# EAGLE board MOD-v2-2.2 (EAGLE 8.3.1)
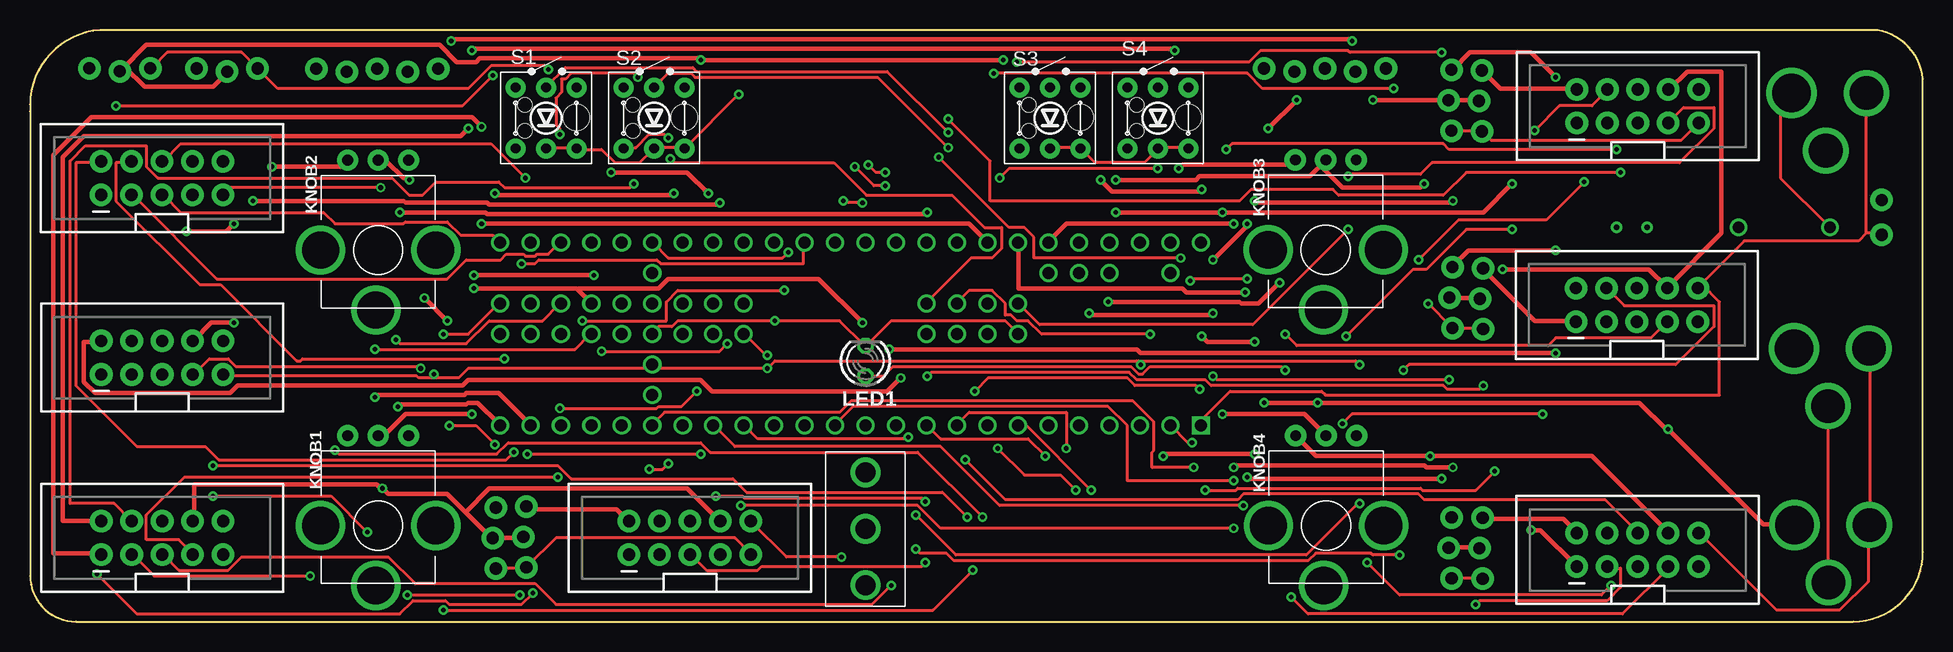
[diagram p0: board, top side]
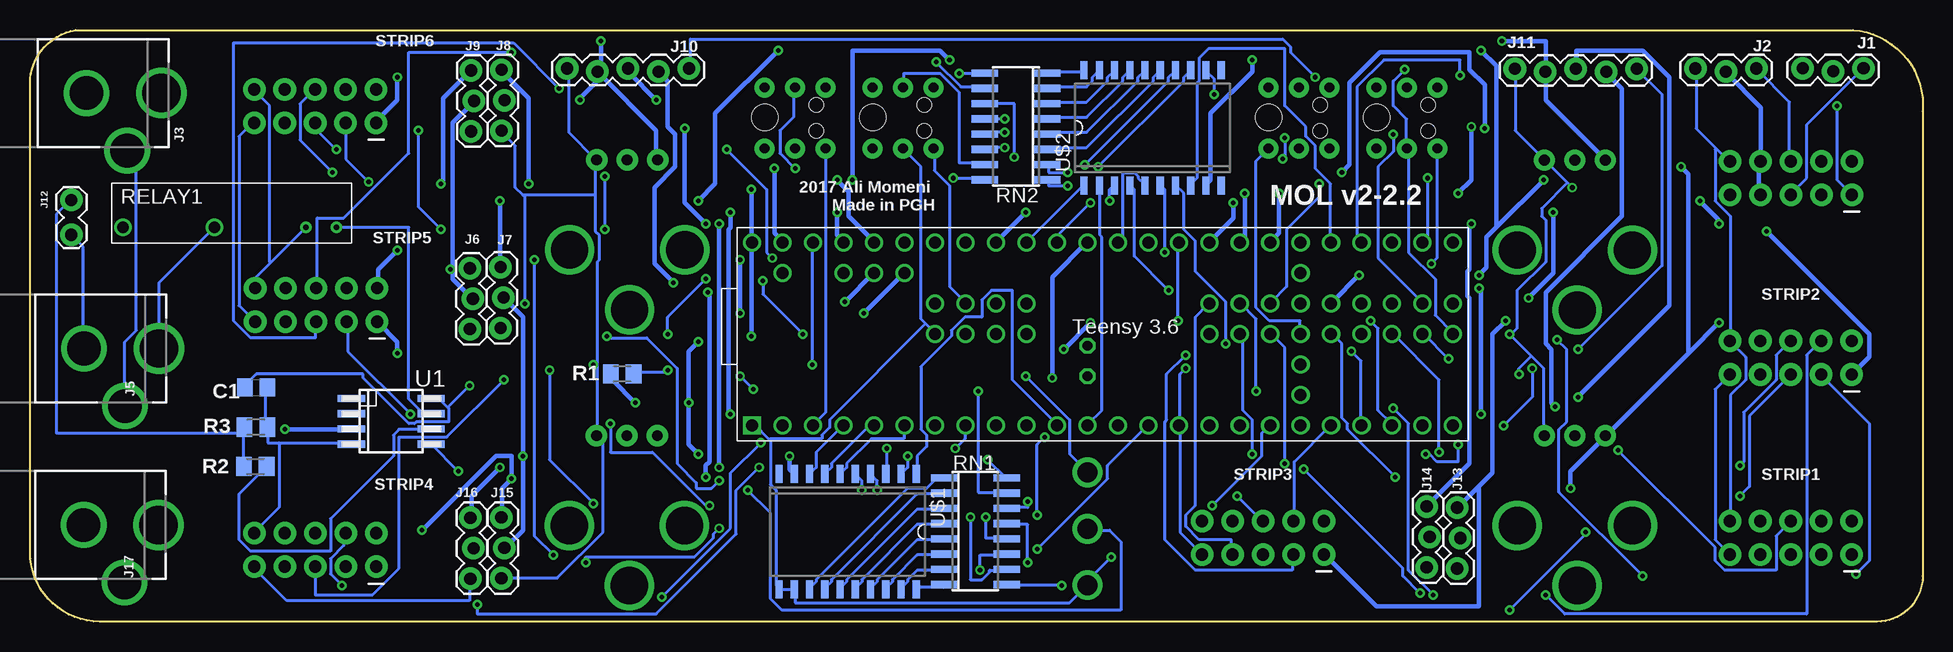
[diagram p1: board, bottom side, seen from below]

Size 157.79 x 49.34 mm. Coordinates in mm from the lower left corner, seen from the top.
Outline: 5.83,49.34 arc90 0.02,42.53 0.02,3.81 arc90 3.83,0 151.98,0 arc90 157.79,5.81 157.79,45.26 arc74 153.98,49.34 5.83,49.34
Copper layers (1*16): Top 0.035559375mm / dielectric 1.501140625mm / Bottom 0.035559375mm
Design rules "typical_4pcb *": minimum track width 10mil, minimum drill 15mil, track to track 6mil, track to pad 6mil, pad to pad 6mil, via to via 10mil, smd to smd 6mil, copper to edge 15mil, drill to drill 8mil, minimum pad ring 10mil, minimum via ring 8mil, stop-mask expansion 4mil, vias tented up to drill 0mil, thermal gap 10mil
Net classes: 2 Power: width 0.381 mm, clearance 0.279 mm; 3 Analog Sig: width 0.381 mm, clearance 0.279 mm

## Footprints (pad centres in the part's own frame; a part is rotated, then mirrored left to right if it is on the bottom)
C0805 = smd 1.3 x 1.5: 1 -0.95,0; 2 0.95,0
1X03_LOCK@1 = drill 1.016 pad 1.88: 1 0,0.127; 2 2.54,-0.127; 3 5.08,0.127
DCJACK_2MM_PTH = drill 2.8: GND 0,7.35; GNDBREAK 4.8,10.75 | drill 3.2: PWR 0,13.6
2X5-SHROUDED_LOCK = drill 1.016 pad 1.88: 1 -1.397,5.08; 2 1.397,5.08; 3 -1.397,2.54; 4 1.397,2.54; 5 -1.397,0; 6 1.397,0; 7 -1.397,-2.54; 8 1.397,-2.54; 9 -1.397,-5.08; 10 1.397,-5.08
1X03_LOCK = drill 1.016 pad 1.88: 1 0,0.127; 2 2.54,-0.127; 3 5.08,0.127
1X05_LOCK = drill 1.016 pad 1.88: 1 0,0.127; 2 2.54,-0.127; 3 5.08,0.127; 4 7.62,-0.127; 5 10.16,0.127
1X02_LOCK = drill 1.016 pad 1.88: 1 -0.178,0; 2 2.718,0
TRIM-PCB-9MM = drill 0.9 pad 1.778: 1 -2.54,-7.5; 2 0,-7.5; 3 2.54,-7.5 | drill 3.1 pad 4: M1 -4.8,0; M2 4.8,0; M3 0.2,5
LED3MM = drill 0.813 octagon: A -1.27,0; K 1.27,0
M0805 = smd 1.3 x 1.6: 1 -0.95,0; 2 0.95,0
G6DN-1A = drill 0.45: 1 0,0; 2 2.54,0 | drill 0.95: 5 10.16,0; 8 17.78,0
SO16 = smd 0.6 x 2.2: 1 -4.445,-2.6; 2 -3.175,-2.6; 3 -1.905,-2.6; 4 -0.635,-2.6; 5 0.635,-2.6; 6 1.905,-2.6; 7 3.175,-2.6; 8 4.445,-2.6; 9 4.445,2.6; 10 3.175,2.6; 11 1.905,2.6; 12 0.635,2.6; 13 -0.635,2.6; 14 -1.905,2.6; 15 -3.175,2.6; 16 -4.445,2.6
SWITCH_TR2-MOMENTARY-LED = drill 0.8 pad 1.676: 1 2.54,-2.54; 2 2.54,2.54; 3 -2.54,-2.54; 4 -2.54,2.54; A 0,2.54; C 0,-2.54 | hole 2.2: 2.53,0.05 | hole 1.2: -1.76,1.1; -1.76,-1.09
SWITCH_SPDT_500SSP1S2M2QEA = drill 1.65: 1 -4.7,0; 2 0,0; 3 4.7,0
TEENSY3-6_NO-USB-HOST = drill 1: 0 3.81,1.27; 1 6.35,1.27; 2 8.89,1.27; 3 11.43,1.27; 3V3(1) 36.83,1.27; 3V3(2) 46.99,6.35; 3V3(3) 6.35,16.51; 3V3(4) 59.69,11.43; 4 13.97,1.27; 5 16.51,1.27; 6 19.05,1.27; 7 21.59,1.27; 8 24.13,1.27; 9 26.67,1.27; 10 29.21,1.27; 11 31.75,1.27; 12 34.29,1.27; 13 34.29,16.51; 14 31.75,16.51; 15 29.21,16.51; 16 26.67,16.51; 17 24.13,16.51; 18 21.59,16.51; 19 19.05,16.51; 20 16.51,16.51; 21 13.97,16.51; 22 11.43,16.51; 23 8.89,16.51; 24 39.37,1.27; 25 41.91,1.27; 26 44.45,1.27; 27 46.99,1.27; 28 49.53,1.27; 29 52.07,1.27; 30 54.61,1.27; 31 57.15,1.27; 32 59.69,1.27; 33 59.69,16.51; 34 57.15,16.51; 35 54.61,16.51; 36 52.07,16.51; 37 49.53,16.51; 38 46.99,16.51; 39 44.45,16.51; 40 39.37,8.89; 41 41.91,8.89; 42 44.45,8.89; 43 49.53,8.89; 44 52.07,8.89; 45 54.61,8.89; 46 57.15,8.89; 47 57.15,11.43; 48 54.61,11.43; 49 52.07,11.43; 50 49.53,11.43; 51 44.45,11.43; 52 41.91,11.43; 53 39.37,11.43; 54 24.13,11.43; 55 21.59,11.43; 56 19.05,11.43; 57 16.51,11.43; A10 11.43,13.97; A11 13.97,13.97; AGND 3.81,16.51; AREF 8.89,13.97; DAC0 41.91,16.51; DAC1 39.37,16.51; DC 21.59,8.89; DD 24.13,8.89; DE 19.05,8.89; G1 46.99,8.89; G2 36.83,16.51; G3 59.69,8.89; G6 16.51,8.89; P 46.99,11.43; R 46.99,13.97; VBAT 46.99,3.81; VIN 1.27,16.51; VUSB 3.81,13.97 | drill 1 square: G0 1.27,1.27
ATTINY85 = smd 0.6 x 2.286: 1 -1.905,-3.33; 2 -0.635,-3.33; 3 0.635,-3.33; 4 1.905,-3.33; 5 1.905,3.33; 6 0.635,3.33; 7 -0.635,3.33; 8 -1.905,3.33
SOIC20 = smd 0.6 x 1.5: 1 -5.715,-4.8; 2 -4.445,-4.8; 3 -3.175,-4.8; 4 -1.905,-4.8; 5 -0.635,-4.8; 6 0.635,-4.8; 7 1.905,-4.8; 8 3.175,-4.8; 9 4.445,-4.8; 10 5.715,-4.8; 11 5.715,4.8; 12 4.445,4.8; 13 3.175,4.8; 14 1.905,4.8; 15 0.635,4.8; 16 -0.635,4.8; 17 -1.905,4.8; 18 -3.175,4.8; 19 -4.445,4.8; 20 -5.715,4.8

## Placement (x,y rotation side)
C1  10uF  [C0805]  138.94,19.54 0 bottom
J1  SERVO1  [1X03_LOCK@1]  10.03,46.02 0 bottom
J2  SERVO2  [1X03_LOCK@1]  18.97,46 0 bottom
J3  TO Pi  [DCJACK_2MM_PTH]  160.44,44.08 270 bottom
J4  ACTUATORS  [2X5-SHROUDED_LOCK]  11.01,36.99 90 top
J5  Battery (Pi)  [DCJACK_2MM_PTH]  160.63,22.77 270 bottom
J6  AN5  [1X03_LOCK]  120.99,24.39 90 bottom
J7  AN6  [1X03_LOCK]  118.44,24.48 90 bottom
J8  AN7  [1X03_LOCK]  118.36,40.94 90 bottom
J9  AN8  [1X03_LOCK]  120.9,40.88 90 bottom
J10  JOY1  [1X05_LOCK]  113.02,46 0 bottom
J11  JOY2  [1X05_LOCK]  34.02,45.98 0 bottom
J12  RPi-Shutdown  [1X02_LOCK]  154.35,34.98 270 bottom
J13  AN5  [1X03_LOCK]  38.7,4.43 90 bottom
J14  AN6  [1X03_LOCK]  41.25,4.52 90 bottom
J15  AN7  [1X03_LOCK]  118.37,3.61 90 bottom
J16  AN8  [1X03_LOCK]  120.95,3.58 90 bottom
J17  Battery (Main)  [DCJACK_2MM_PTH]  160.67,8.06 270 bottom
KNOB1  [TRIM-PCB-9MM]  29.02,8 180 top
KNOB2  [TRIM-PCB-9MM]  29.02,30.99 180 top
KNOB3  [TRIM-PCB-9MM]  108.01,31.01 180 top
KNOB4  [TRIM-PCB-9MM]  108.03,8 180 top
LED1  [LED3MM]  69.64,21.74 90 top
R1  330  [M0805]  108.43,20.65 0 bottom
R2  2.2K  [M0805]  139.01,12.95 180 bottom
R3  3.3K  [M0805]  138.95,16.22 0 bottom
RELAY1  RELAY-OMRON-G6DN  [G6DN-1A]  132.25,32.88 180 bottom
RN1  [SO16]  78.99,7.54 270 bottom
RN2  [SO16]  75.6,41.29 90 bottom
S1  SW-LEDPTH  [SWITCH_TR2-MOMENTARY-LED]  43.02,42 0 top
S2  SW-LEDPTH  [SWITCH_TR2-MOMENTARY-LED]  52.02,42 0 top
S3  SW-LEDPTH  [SWITCH_TR2-MOMENTARY-LED]  85.02,42 0 top
S4  SW-LEDPTH  [SWITCH_TR2-MOMENTARY-LED]  94.02,42 0 top
STRIP1  [2X5-SHROUDED_LOCK]  11.02,6.99 90 top
STRIP2  [2X5-SHROUDED_LOCK]  11.02,22.01 90 top
STRIP3  [2X5-SHROUDED_LOCK]  55.01,6.99 90 top
STRIP4  [2X5-SHROUDED_LOCK]  134.01,5.98 90 top
STRIP5  [2X5-SHROUDED_LOCK]  133.94,26.41 90 top
STRIP6  [2X5-SHROUDED_LOCK]  134.02,42.99 90 top
SW2  500SSP1S2M2QEA  [SWITCH_SPDT_500SSP1S2M2QEA]  69.64,7.74 270 top
TEENSY  TEENSY3_6-ALI_NO-USB-HOST  [TEENSY3-6_NO-USB-HOST]  98.86,15.09 0 bottom
U1  ATTINY85  [ATTINY85]  127.68,16.7 270 bottom
U$1  A2982  [SOIC20]  89.63,7.5 180 bottom
U$2  A2982  [SOIC20]  64.21,41.18 0 bottom

## Library data of the parts
C1 = resistor
J1 J2 J6 J9-J12 J14 J16 = SparkFun-Connectors
J3 J5 J17 = adafruit
J4 STRIP1-STRIP6 = SparkFun-Connectors; PROD_ID: CONN-08671; SF_ID: PRT-08506
J7 J8 J13 J15 = SparkFun-Connectors; GND: GND; SIG: SIG; VCC: VCC
KNOB1-KNOB4 RELAY1 S1-S4 TEENSY U$1 U$2 = CMU-ArtFab
LED1 = led; GND: -; P: +
R1-R3 = rcl
RN1 RN2 = resistor-bourns; OC_FARNELL: unknown; OC_NEWARK: unknown
SW2 = CMU-ArtFab; DIGIKEY: EG5137-ND
U1 = attiny85

## Nets
+3V3: J4.9 J6.1 J7.1 J8.1 J9.1 J10.1 J11.1 J13.1 J14.1 J15.1 J16.1 KNOB1.1 KNOB2.1 KNOB3.1 KNOB4.1 STRIP1.9 STRIP2.9 STRIP3.9 STRIP4.9 STRIP5.9 STRIP6.9 TEENSY.3V3(1) TEENSY.3V3(2) TEENSY.3V3(3) TEENSY.3V3(4)
+5V [Power]: J1.2 J2.2 J4.7 J4.8 J17.PWR R1.1 TEENSY.VIN U1.3 U$1.9 U$2.9
+5V-BATTERY: C1.1 SW2.1 U1.8
+5V-BATTERY-PI: J5.PWR RELAY1.5
AGND [Analog Sig]: J6.2 J7.2 J8.2 J9.2 J10.2 J11.2 J13.2 J14.2 J15.2 J16.2 KNOB1.3 KNOB2.3 KNOB3.3 KNOB4.3 STRIP1.8 STRIP2.8 STRIP3.8 STRIP4.8 STRIP5.8 STRIP6.8 TEENSY.AGND
AN1 [Analog Sig]: STRIP1.1 TEENSY.39
AN2 [Analog Sig]: STRIP1.2 TEENSY.DAC0
AN3 [Analog Sig]: STRIP2.1 TEENSY.DAC1
AN4 [Analog Sig]: STRIP2.2 TEENSY.15
AN5 [Analog Sig]: J13.3 STRIP3.1 TEENSY.18
AN6 [Analog Sig]: J14.3 STRIP3.2 TEENSY.19
AN7 [Analog Sig]: J15.3 STRIP4.1 TEENSY.20
AN8 [Analog Sig]: J16.3 STRIP4.2 TEENSY.21
AN9 [Analog Sig]: J6.3 KNOB1.2 STRIP5.1 TEENSY.49
AN10 [Analog Sig]: J7.3 KNOB2.2 STRIP5.2 TEENSY.50
AN11 [Analog Sig]: J8.3 KNOB3.2 STRIP6.1 TEENSY.22
AN12 [Analog Sig]: J9.3 KNOB4.2 STRIP6.2 TEENSY.23
B1: STRIP1.3 TEENSY.48
B2: STRIP1.4 TEENSY.51
B3: STRIP2.3 TEENSY.42
B4: STRIP2.4 TEENSY.52
B5: STRIP3.3 TEENSY.40
B6: STRIP3.4 TEENSY.28
B7: STRIP4.3 TEENSY.27
B8: STRIP4.4 TEENSY.26
B9: STRIP5.3 TEENSY.25
B10: STRIP5.4 TEENSY.24
B11: STRIP6.3 TEENSY.12
B12: STRIP6.4 TEENSY.11
B13: S1.3 TEENSY.13
B14: S2.3 TEENSY.54
B15: S3.3 TEENSY.56
B16: S4.3 TEENSY.1
GND: C1.2 J1.1 J2.1 J3.GND J4.10 J5.GND J12.2 J17.GND LED1.K R3.2 RELAY1.2 S1.1 S1.C S2.1 S2.C S3.1 S3.C S4.1 S4.C STRIP1.10 STRIP2.10 STRIP3.10 STRIP4.10 STRIP5.10 STRIP6.10 SW2.3 TEENSY.G0 TEENSY.G1 TEENSY.G2 TEENSY.G3 TEENSY.G6 U1.4 U$1.11 U$1.12 U$2.12
GNDBREAK: J3.GNDBREAK J5.GNDBREAK J17.GNDBREAK
JOYB1: J10.5 TEENSY.47
JOYB2: J11.5 TEENSY.44
JOYH1 [Analog Sig]: J10.3 TEENSY.A11
JOYH2 [Analog Sig]: J11.3 TEENSY.31
JOYV1 [Analog Sig]: J10.4 TEENSY.A10
JOYV2 [Analog Sig]: J11.4 TEENSY.32
LED1: STRIP1.7 TEENSY.43
LED2: STRIP2.7 TEENSY.41
LED3: STRIP3.7 TEENSY.53
LED4: STRIP4.7 TEENSY.0
LED5: STRIP5.7 TEENSY.55
LED6: STRIP6.7 TEENSY.57
M_INA: J4.2 TEENSY.45
M_INB: J4.4 TEENSY.46
M_PWMA: J4.1 TEENSY.36
M_PWMB: J4.3 TEENSY.35
N$2: LED1.A R1.2
N$3: SW2.2 U1.5
N$4: RELAY1.1 U1.7
N$5: J12.1 R2.2 R3.1
N$6: J3.PWR RELAY1.8
N$7: RN1.1 U$1.13
N$8: RN1.2 U$1.14
N$11: RN1.3 U$1.15
N$12: RN1.5 U$1.17
N$13: RN1.4 U$1.16
N$14: RN1.6 U$1.18
N$15: RN1.7 U$1.19
N$16: RN1.8 U$1.20
N$17: RN2.1 U$2.13
N$18: RN2.2 U$2.14
N$19: RN2.3 U$2.15
N$20: RN2.4 U$2.16
N$21: RN2.5 U$2.17
N$22: RN2.6 U$2.18
N$23: RN2.7 U$2.19
N$24: RN2.8 U$2.20
PI-REST: R2.1 U1.6
PWM1: TEENSY.2 U$1.8
PWM2: TEENSY.3 U$1.7
PWM3: TEENSY.4 U$1.6
PWM4: TEENSY.5 U$1.5
PWM5: TEENSY.6 U$1.4
PWM6: TEENSY.7 U$1.3
PWM7: TEENSY.8 U$1.2
PWM8: TEENSY.9 U$1.1
PWM9: TEENSY.37 U$2.8
PWM10: TEENSY.29 U$2.7
PWM11: TEENSY.38 U$2.6
PWM12: TEENSY.14 U$2.5
PWM13: TEENSY.30 U$2.4
PWM14: TEENSY.16 U$2.3
PWM15: TEENSY.10 U$2.2
PWM16: TEENSY.17 U$2.1
PWM_1: RN1.9 STRIP1.5
PWM_2: RN1.10 STRIP1.6
PWM_3: RN1.11 STRIP2.5
PWM_4: RN1.12 STRIP2.6
PWM_5: RN1.13 STRIP3.5
PWM_6: RN1.14 STRIP3.6
PWM_7: RN1.15 STRIP4.5
PWM_8: RN1.16 STRIP4.6
PWM_9: RN2.9 STRIP5.5
PWM_10: RN2.10 STRIP5.6
PWM_11: RN2.11 STRIP6.5
PWM_12: RN2.12 STRIP6.6
PWM_13: RN2.13 S1.A
PWM_14: RN2.14 S2.A
PWM_15: RN2.15 S3.A
PWM_16: RN2.16 S4.A
S1: J1.3 J4.5 TEENSY.33
S2: J2.3 J4.6 TEENSY.34

## Tracks (layer width: path | path; a pad name or v marks a point on that pad's centre or on a via)
+3V3  (via drill 0.38)
  Top 0.254: J16.1 120.99,3.65 118.61,3.65 J15.1 | J6.1 120.99,24.45 118.61,24.45 J7.1 118.45,24.61 v116.54,26.51 | J8.1 118.61,40.96 120.99,40.96 J9.1 121.15,40.8 121.78,40.16 137.66,40.16 139.08,41.59 STRIP6.9 | v34.47,23.97 36.53,23.97 39.07,26.51 TEENSY.3V3(4) | v29.23,36.2 16.69,36.2 16.21,35.72 J4.9 | J13.1 38.91,4.45 41.29,4.45 J14.1 41.45,4.6 43.83,6.99 58.76,6.99 60.03,5.71 STRIP3.9 | 33.67,20.32 35.74,20.32 36.53,21.11 52.09,21.11 TEENSY.3V3(2) 51.93,21.43 52.25,21.11 v61.46,21.11 62.09,21.75 92.25,21.75 v92.57,21.43 92.41,21.75 110.51,21.75 v110.83,21.43 | 33.67,20.32 32.4,20.32 32.25,20.48 16.21,20.48 STRIP2.9 | 33.67,20.32 v33.67,20.64
  Bottom 0.254: J15.1 118.45,3.65 113.84,3.65 110.03,7.46 110.03,14.92 110.51,15.4 KNOB4.1 110.51,15.56 110.51,21.43 | STRIP4.9 139.08,4.45 136.39,1.75 121.15,1.75 121.15,3.49 J16.1 | STRIP5.9 139.08,25.08 140.35,26.35 140.35,40.48 139.24,41.59 STRIP6.9 | J10.1 112.89,46.04 112.89,40.8 110.67,38.58 KNOB3.1 110.67,38.42 110.67,35.56 | 110.67,35.56 116.54,35.56 | 116.54,35.56 116.7,35.56 117.34,36.2 117.34,39.69 118.45,40.8 J8.1 | 116.54,35.56 v116.54,26.51 | 110.51,21.43 110.51,30 110.35,30.16 110.35,32.23 110.67,32.54 110.67,35.56 | 32.64,22.15 31.61,21.11 31.61,15.56 KNOB1.1 | 32.64,22.15 v34.47,23.97 34.31,23.97 33.83,24.45 33.83,27.62 31.45,30 31.45,33.5 31.77,33.81 31.77,34.45 29.63,36.59 | J11.1 33.99,46.04 33.99,40.96 31.61,38.58 KNOB2.1 31.45,38.42 29.63,36.59 | 29.63,36.59 v29.23,36.2 | STRIP1.9 16.21,5.71 17.32,6.83 17.32,19.37 16.21,20.48 STRIP2.9 | v61.46,21.11 61.93,20.64 61.93,16.51 TEENSY.3V3(1) 61.93,16.35 61.93,7.46 60.19,5.71 STRIP3.9 | v92.57,21.43 92.57,31.59 TEENSY.3V3(3) | 32.64,22.15 33.67,21.11 v33.67,20.64 | v110.83,21.43 110.51,21.43
+5V  (via drill 0.38)
  Top 0.381: J2.2 16.37,45.72 15.26,44.61 9.54,44.61 7.96,46.2 J1.2 7.64,46.04 9.7,48.1 34.15,48.1 35.58,46.67 37.17,46.67 37.48,46.99 55.74,46.99 v55.9,46.83 v81.14,46.83 | J17.PWR 147.02,8.1 144.48,8.1 v136.54,16.03 136.39,16.03 134.16,18.26 v107.33,18.26 v102.89,18.26 | v94.48,13.81 94.63,13.97 v102.1,13.97 | v97.65,23.81 98.13,23.34 v102.1,23.34 | v89.24,36.83 90.19,35.88 97.49,35.88 v97.65,36.04
  Bottom 0.381: J4.7 13.67,35.72 13.67,38.26 J4.8 13.51,38.58 13.51,42.86 16.37,45.72 J2.2 | v55.9,46.83 55.9,45.88 59.39,42.39 59.39,36.83 59.71,36.51 U$2.9 | v136.54,16.03 131.15,16.03 U1.3 | v94.48,13.81 94.48,12.7 94.16,12.38 U$1.9 | v102.1,13.97 102.89,14.76 v102.89,18.26 102.89,22.54 v102.1,23.34 | v107.33,18.26 109.24,20.16 109.24,20.64 R1.1 | v97.65,23.81 97.65,31.59 TEENSY.VIN 97.65,31.75 v97.65,36.04 | v81.14,46.83 81.93,47.62 89.24,47.62 v89.24,36.83
+5V-BATTERY  (via drill 0.38)
  Top 0.254: v74.79,20.48 75.11,20.8 91.62,20.8 92.25,20.16 97.97,20.16 98.44,19.68 117.81,19.68 118.13,19.37 120.83,19.37 v121.15,19.68
  Bottom 0.254: 122.97,17.86 123.69,18.57 124.32,18.57 U1.8 | 122.97,17.86 122.89,17.78 122.89,16.67 125.59,16.67 125.75,16.51 126.23,16.51 130.04,20.32 130.04,20.64 138.93,20.64 139.88,19.68 C1.1 | v74.79,20.48 71.14,16.83 71.14,13.97 69.71,12.54 SW2.1 | 122.97,17.86 v121.15,19.68
+5V-BATTERY-PI
  Bottom 0.254: RELAY1.5 142.42,32.86 147.02,28.26 147.02,22.86 J5.PWR
AGND  (via drill 0.38)
  Top 0.381: KNOB4.3 105.59,15.4 107.18,13.81 v116.7,13.81 130.19,13.81 136.54,7.46 STRIP4.8 | v95.75,37.78 96.06,38.1 105.11,38.1 105.43,38.42 KNOB3.3 | STRIP6.8 136.7,44.45 138.13,45.88 140.99,45.88 140.99,32.38 136.54,27.94 STRIP5.8 136.39,27.94 134.96,29.37 v122.73,29.37 | J15.2 118.29,6.19 120.67,6.19 J16.2 | J9.2 120.67,43.5 118.29,43.5 J8.2 118.13,43.5 v111.94,43.5 | J6.2 120.83,26.99 118.45,26.99 J7.2 | 36.29,9.13 38.44,6.99 J13.2 38.75,6.99 40.98,6.99 J14.2 | 36.29,9.13 34.79,10.64 29.86,10.64 v29.39,11.11 29.23,11.11 28.91,11.43 13.67,11.43 13.67,8.41 STRIP1.8 | v17.01,24.92 15.1,24.92 13.67,23.5 STRIP2.8 | 36.29,9.13 38.28,11.11 54.79,11.11 57.49,8.41 STRIP3.8 | v20.18,37.94 25.9,37.94 26.37,38.42 KNOB2.3 | v110.19,48.42 110.03,48.58 35.26,48.58 v35.1,48.42
  Bottom 0.381: v95.75,37.78 95.75,32.38 95.11,31.75 TEENSY.AGND | J10.2 110.35,45.72 105.59,40.96 105.59,38.58 KNOB3.3 | 122.57,29.37 122.57,28.57 120.99,26.99 J6.2 | 122.57,29.37 122.57,41.59 120.83,43.34 J9.2 | J15.2 118.13,6.19 116.7,7.62 v116.7,13.81 116.7,25.4 118.29,26.99 J7.2 | v122.73,29.37 122.57,29.37 | v111.94,43.5 111.94,43.66 110.19,45.4 J10.2 | KNOB2.3 26.53,38.58 31.45,43.5 31.45,45.72 J11.2 31.45,46.04 31.45,48.42 v35.1,48.42 | v29.39,11.11 29.39,12.54 26.53,15.4 KNOB1.3 26.37,15.56 19.47,22.46 | 19.47,22.46 v17.01,24.92 | v20.18,37.94 19.55,37.31 19.55,22.54 19.47,22.46 | v110.19,48.42 110.19,46.35 110.51,46.04 J10.2
AN1  (via drill 0.38)
  Top 0.381: v53.68,35.72 53.52,35.56 38.91,35.56 v38.75,35.72 | v37.64,41.27 36.85,42.07 5.1,42.07 1.92,38.89 1.92,5.71 5.89,5.71 STRIP1.1
  Bottom 0.381: v53.68,35.72 53.68,32.38 54.31,31.75 TEENSY.39 | v38.75,35.72 37.64,36.83 v37.64,41.27
AN2  (via drill 0.38)
  Top 0.381: v56.53,35.72 54.79,37.47 v48.44,37.47 | v36.53,41.12 35.9,40.48 4.46,40.48 2.72,38.73 2.72,8.41 5.89,8.41 STRIP1.2
  Bottom 0.381: v56.53,35.72 56.53,32.07 56.85,31.75 TEENSY.DAC0 | v48.44,37.47 47.8,38.1 47.8,44.93 45.26,47.47 37.8,47.47 37.8,46.04 36.53,44.77 v36.53,41.12
AN3  (via drill 0.38)
  Top 0.381: v57.49,34.92 57.33,34.77 38.28,34.77 38.12,34.92 31.29,34.92 31.13,35.08 v18.59,35.08 | v17.01,33.18 16.37,32.54 v13.04,32.54
  Bottom 0.381: v57.49,34.92 57.49,33.66 59.39,31.75 TEENSY.DAC1 | v18.59,35.08 17.01,33.5 v17.01,33.18 | v13.04,32.54 4.46,23.97 4.46,22.07 5.89,20.64 STRIP2.1
AN4  (via drill 0.38)
  Top 0.381: v72.57,20.32 71.46,19.21 56.85,19.21 55.9,20.16 36.53,20.16 36.06,19.68 17.32,19.68 16.69,19.05 5.42,19.05 4.46,20 4.46,23.34 5.89,23.34 STRIP2.2
  Bottom 0.381: v72.57,20.32 72.57,28.73 69.71,31.59 TEENSY.15
AN5  (via drill 0.38)
  Top 0.381: v74.79,34.13 74.63,33.97 38.12,33.97 37.96,34.13 v30.82,34.13 | v34.79,25.08 v32.88,26.99
  Bottom 0.381: v74.79,34.13 77.17,31.75 TEENSY.18 | v30.82,34.13 30.82,29.05 v32.88,26.99 | v34.79,25.08 35.9,23.97 35.9,12.38 37.09,11.19 | 37.09,11.19 38.75,9.53 J13.3 | STRIP3.1 49.87,5.56 45.58,1.27 37.01,1.27 37.01,11.11 37.09,11.19
AN6  (via drill 0.38)
  Top 0.381: v37.64,33.18 78.28,33.18 79.71,31.75 TEENSY.19 | STRIP3.2 49.87,8.41 48.91,9.37 41.61,9.37 41.45,9.53 J14.3
  Bottom 0.381: v37.64,33.18 37.8,33.02 37.8,29.37 37.96,29.21 37.96,27.15 37.8,26.99 37.8,13.18 41.29,9.68 J14.3
AN7  (via drill 0.38)
  Top 0.381: v101.3,27.46 96.38,27.46 96.06,27.78 82.41,27.78 82.41,31.59 TEENSY.20 | v101.46,12.06 101.62,11.91 v117.65,11.91 | v125.11,7.62 125.91,7.62 128.92,4.6 STRIP4.1
  Bottom 0.381: v101.3,27.46 101.14,27.3 101.14,13.34 101.46,13.02 v101.46,12.06 | J15.3 118.45,8.73 118.45,11.11 v117.65,11.91 117.65,13.81 118.92,13.81 v125.11,7.62
AN8  (via drill 0.38)
  Top 0.381: v100.35,33.18 86.38,33.18 84.95,31.75 TEENSY.21 | v100.35,12.86 100.51,13.02 116.22,13.02 116.38,12.86 v118.61,12.86 | STRIP4.2 128.92,7.46 127.81,8.57 121.15,8.57 J16.3
  Bottom 0.381: v100.35,12.86 v100.35,33.18 | v118.61,12.86 120.99,10.48 120.99,8.73 J16.3
AN9  (via drill 0.38)
  Top 0.381: J6.3 121.15,29.37 125.43,25.08 128.77,25.08 STRIP5.1 | 45.66,27.7 45.58,27.78 v37.01,27.78 | 45.66,27.7 46.69,26.67 TEENSY.49 | v36.85,17.3 31.29,17.3 29.55,15.56 29.07,15.56 KNOB1.2 | v127.18,22.38 92.57,22.38 92.25,22.7 v71.62,22.7 | v69.39,24.92 65.74,28.57 53.2,28.57 52.41,27.78 45.74,27.78 45.66,27.7
  Bottom 0.381: v37.01,27.78 36.85,27.62 v36.85,17.3 | v127.18,22.38 127.18,23.34 128.77,24.92 STRIP5.1 | v69.39,24.92 v71.62,22.7
AN10  (via drill 0.38)
  Top 0.381: v127.18,30.96 119.88,30.96 118.61,29.69 J7.3 | v37.01,28.89 v47.01,28.89 | v31.61,36.83 31.45,36.99 31.13,36.99 29.71,38.42 29.07,38.42 KNOB2.2 | v118.61,35.08 118.45,34.92 102.25,34.92 v102.1,35.08 | v95.43,47.62 95.27,47.78 37.01,47.78 v36.85,47.62
  Bottom 0.381: v127.18,30.96 128.77,29.37 128.77,27.94 STRIP5.2 | v47.01,28.89 49.23,26.67 TEENSY.50 | v37.01,28.89 36.37,29.53 36.37,32.07 35.5,32.94 | v31.61,36.83 35.5,32.94 | v118.61,35.08 118.61,29.69 J7.3 | v102.1,35.08 100.67,36.51 100.67,42.39 v95.43,47.62 | v36.85,47.62 35.58,46.35 35.58,33.02 35.5,32.94
AN11  (via drill 0.38)
  Top 0.381: v127.18,45.4 125.11,47.47 120.03,47.47 118.61,46.04 J8.3 | v90.51,36.83 97.17,36.83 97.49,37.15 106.7,37.15 107.97,38.42 KNOB3.2 107.65,37.94 109.4,36.2 115.91,36.2 v116.22,36.51
  Bottom 0.381: v127.18,45.4 127.18,43.5 128.92,41.75 STRIP6.1 | v90.51,36.83 89.55,35.88 89.55,33.81 87.49,31.75 TEENSY.22 | v116.22,36.51 116.22,43.66 118.45,45.88 J8.3
AN12  (via drill 0.38)
  Top 0.381: v90.51,34.13 v99.4,34.13 121.15,34.13 v123.53,36.51 | v99.4,17.3 106.22,17.3 107.97,15.56 KNOB4.2 | STRIP6.2 128.92,44.45 122.57,44.45 121.15,45.88 J9.3
  Bottom 0.381: v90.51,34.13 90.51,32.23 90.03,31.75 TEENSY.23 | v123.53,36.51 123.37,36.67 123.37,43.66 121.15,45.88 J9.3 | v99.4,17.3 99.56,17.46 99.56,32.7 99.4,32.86 v99.4,34.13
B1  (via drill 0.38)
  Top 0.254: v30.5,23.5 30.82,23.18 36.37,23.18 38.28,25.08 42.72,25.08 44.15,26.51 TEENSY.48 | v23.36,3.81 10.34,3.81 8.59,5.56 STRIP1.3
  Bottom 0.254: v30.5,23.5 29.71,22.7 29.71,16.67 30.34,16.03 30.34,10.79 v23.36,3.81
B2  (via drill 0.38)
  Top 0.254: v50.34,36.51 50.03,36.2 39.55,36.2 39.07,36.67 33.83,36.67 32.72,35.56 31.61,35.56 30.18,36.99 10.66,36.99 9.7,37.94 9.7,39.69 4.62,39.69 3.35,38.42 3.35,9.84 7,9.84 8.43,8.41 STRIP1.4
  Bottom 0.254: v50.34,36.51 50.34,35.4 53.04,32.7 53.04,27.94 54.31,26.67 TEENSY.51
B3  (via drill 0.38)
  Top 0.254: v53.2,13.18 52.72,12.7 v51.61,12.7 | v41.93,2.38 40.98,1.43 34.94,1.43 34.63,1.75 31.93,1.75 30.82,0.64 8.91,0.64 v5.58,3.97
  Bottom 0.254: v53.2,13.18 53.2,22.86 54.31,23.97 TEENSY.42 | v51.61,12.7 43.36,4.45 43.36,3.81 v41.93,2.38 | v5.58,3.97 4.46,5.08 4.46,16.51 8.43,20.48 STRIP2.3
B4  (via drill 0.38)
  Top 0.254: v55.58,19.21 54.31,17.94 52.41,17.94 52.25,17.78 v44.15,17.78 | v31.45,2.22 v40.82,2.22
  Bottom 0.254: v55.58,19.21 55.58,25.24 56.85,26.51 TEENSY.52 | v44.15,17.78 42.88,16.51 42.88,4.29 v40.82,2.22 | v31.45,2.22 29.86,0.64 9.7,0.64 9.7,22.23 8.59,23.34 STRIP2.4
B5  (via drill 0.38)
  Top 0.254: v61.46,22.23 61.3,22.23 59.55,23.97 TEENSY.40
  Bottom 0.254: v61.46,22.23 63.04,20.64 63.04,16.83 63.2,16.67 63.2,6.83 60.66,4.29 52.57,4.29 52.57,5.56 STRIP3.3
B6
  Bottom 0.254: TEENSY.28 49.39,16.35 52.41,13.34 52.41,8.41 STRIP3.4
B7  (via drill 0.38)
  Top 0.254: v97.02,12.86 93.52,12.86 93.52,14.13 93.68,14.29 93.68,16.67 91.94,18.41 68.44,18.41 67.49,17.46 52.88,17.46 51.93,16.51 TEENSY.27 | v120.51,1.43 120.83,1.75 131.46,1.75 132.58,2.86 132.58,4.45 131.62,4.45 STRIP4.3
  Bottom 0.254: v97.02,12.86 98.92,10.95 98.92,7.3 105.59,0.64 120.51,0.64 v120.51,1.43
B8  (via drill 0.38)
  Top 0.254: v59.23,9.68 74,9.68 75.9,7.78 v100.35,7.78 | v111.46,4.92 114.16,2.22 130.99,2.22 v131.78,3.02
  Bottom 0.254: v59.23,9.68 55.11,13.81 55.11,15.72 54.47,16.35 TEENSY.26 | v100.35,7.78 100.83,7.3 100.83,6.99 102.41,5.4 111.46,5.4 v111.46,4.92 | v131.78,3.02 132.73,3.97 132.73,5.24 131.62,6.35 131.62,7.3 STRIP4.4
B9  (via drill 0.38)
  Top 0.254: v101.14,9.68 80.82,9.68 75.9,14.61 58.76,14.61 57.01,16.35 TEENSY.25 | v109.4,16.51 110.19,17.3 v126.07,17.3
  Bottom 0.254: v101.14,9.68 101.46,9.68 105.91,14.13 109.4,14.13 v109.4,16.51 | v126.07,17.3 131.31,22.54 131.31,24.92 STRIP5.3
B10  (via drill 0.38)
  Top 0.254: v73.2,15.4 73.04,15.24 60.66,15.24 59.55,16.35 TEENSY.24 | v73.84,8.89 77.17,5.56 106.38,5.56 110.67,9.84 v110.83,9.84 | v114.48,20.95 114.95,21.43 137.18,21.43 140.35,24.61 140.35,26.35 132.89,26.35 131.46,27.78 STRIP5.4
  Bottom 0.254: v73.2,15.4 73.84,14.76 v73.84,8.89 | v110.83,9.84 114.48,13.49 v114.48,20.95
B11  (via drill 0.38)
  Top 0.254: v73.84,6.03 74.16,5.71 76.38,5.71 77.01,5.08 106.54,5.08 107.18,5.71 111.78,5.71 111.94,5.56 v114.16,5.56 | v115.75,30.16 119.08,33.5 126.38,33.5 v129.56,36.67
  Bottom 0.254: v73.84,6.03 67.96,11.91 67.96,13.02 64.63,16.35 TEENSY.12 | v114.16,5.56 115.75,7.14 v115.75,30.16 | v129.56,36.67 131.46,38.58 131.46,41.59 STRIP6.3
B12  (via drill 0.38)
  Top 0.254: v100.35,11.75 91.46,11.75 91.46,16.35 89.87,17.94 68.6,17.94 67.17,16.51 TEENSY.11 | v109.72,23.81 115.27,29.37 116.38,29.37 119.72,32.7 v123.53,32.7 | v125.43,40.96 127.5,43.02 130.19,43.02 131.46,44.29 STRIP6.4
  Bottom 0.254: v100.35,11.75 100.98,11.11 102.25,11.11 102.25,11.59 103.84,13.18 103.84,21.11 106.38,23.65 109.72,23.65 v109.72,23.81 | v123.53,32.7 125.43,34.61 v125.43,40.96
B13  (via drill 0.38)
  Top 0.254: v40.98,29.84 42.09,29.84 42.41,30.16 52.25,30.16 52.57,29.84 64.47,29.84 64.47,31.59 TEENSY.13
  Bottom 0.254: v40.98,29.84 40.5,30.32 40.5,39.37 S1.3
B14  (via drill 0.38)
  Top 0.254: v53.36,38.58 53.68,38.26 67.01,38.26 69.71,35.56 76.85,35.56 79.55,32.86 80.98,32.86 80.98,31.11 80.19,30.32 78.44,30.32 74.79,26.67 TEENSY.54 | v53.2,40.32 52.88,40.64 51.61,40.64 50.5,39.53 49.55,39.53 S2.3
  Bottom 0.254: v53.36,38.58 53.2,38.73 v53.2,40.32
B15
  Bottom 0.254: TEENSY.56 79.87,26.67 81.14,27.94 81.14,36.35 82.41,37.62 82.41,39.37 S3.3
B16
  Bottom 0.254: TEENSY.1 92.41,16.51 91.46,17.46 91.46,39.37 S4.3
GND  (via drill 0.38)
  Top 0.254: J5.GND 153.37,22.7 153.37,8.1 J17.GND 153.21,7.94 153.21,3.33 150.83,0.95 145.59,0.95 139.24,7.3 STRIP4.10 | 153.05,32.38 153.05,43.97 J3.GND | 153.05,32.38 154.32,32.38 J12.2 | 153.05,32.38 152.42,31.75 142.89,31.75 139.08,27.94 STRIP5.10 139.4,28.1 140.83,26.67 140.83,18.89 107.97,18.89 107.65,19.21 100.03,19.21 97.65,16.83 97.65,16.51 TEENSY.G0 | J1.1 10.18,46.2 11.45,47.47 17.64,47.47 18.91,46.2 J2.1 19.07,46.04 20.66,44.45 36.53,44.45 38.44,46.35 42.88,46.35 v43.2,46.04 | v59.07,43.97 54.63,39.53 S2.1 54.47,39.53 52.09,39.53 S2.C 51.93,39.37 50.82,38.26 48.76,38.26 47.64,39.37 45.58,39.37 S1.1 45.42,39.53 43.04,39.53 S1.C | v67.65,5.4 63.04,5.4 60.19,8.26 STRIP3.10 | S3.C 85.11,39.53 87.49,39.53 S3.1 88.76,38.26 92.89,38.26 94,39.37 S4.C 94.16,39.53 96.54,39.53 S4.1 | TEENSY.G6 82.25,24.13 81.3,25.08 71.77,25.08 69.71,23.02 LED1.K 69.55,23.02 67.49,25.08 v62.09,25.08 53.99,25.08 53.52,24.61 52.41,24.61 51.93,24.13 TEENSY.G1
  Bottom 0.254: 137.74,29.92 138.93,28.73 138.93,27.94 STRIP5.10 | 137.74,29.92 134.8,32.86 RELAY1.2 | STRIP6.10 139.08,44.29 137.81,43.02 137.81,30 137.74,29.92 | C1.2 138.13,19.53 138.13,16.35 R3.2 137.97,16.19 137.97,14.92 137.02,14.92 | 137.02,14.92 131.15,14.92 U1.4 | 137.02,14.92 137.02,9.53 139.08,7.46 STRIP4.10 | J12.2 154.32,32.23 153.37,31.27 153.37,22.86 J5.GND | STRIP1.10 16.05,8.41 16.05,18.89 14.78,20.16 14.78,22.07 16.05,23.34 STRIP2.10 16.05,23.5 16.05,33.81 17.32,35.08 17.32,39.37 17.24,39.45 | 17.24,39.45 18.91,41.12 18.91,46.04 J2.1 | 17.24,39.45 16.21,38.42 J4.10 | v59.07,43.97 59.07,45.24 59.71,45.88 U$2.12 | TEENSY.G3 39.23,24.13 40.66,25.56 40.66,28.57 42.88,30.8 42.88,39.37 S1.C 43.04,39.53 43.04,41.91 44.15,43.02 44.15,45.09 v43.2,46.04 | v67.65,5.4 69.55,3.49 69.55,3.17 SW2.3 69.71,3.02 71.14,1.59 94,1.59 94,2.7 U$1.12 94.16,2.7 95.27,2.7 U$1.11 95.43,2.86 95.59,3.02 95.59,10.95 96.06,11.43 96.06,15.08 96.14,15.16 | 96.14,15.16 97.49,16.51 TEENSY.G0 | v62.09,25.08 62.09,31.59 TEENSY.G2 | 83.13,24.84 82.41,24.13 TEENSY.G6 | 83.13,24.84 83.52,25.24 83.52,37.94 84.95,39.37 S3.C | 83.13,24.84 91.14,16.83 91.14,16.19 91.78,15.56 91.78,15.24 96.06,15.24 96.14,15.16 | S2.1 54.63,39.37 55.58,38.42 55.58,26.19 54.47,25.08 51.93,25.08 51.93,24.13 TEENSY.G1
GNDBREAK
  Top 0.254: J5.GNDBREAK 149.88,17.94 149.88,3.33 J17.GNDBREAK
  Bottom 0.254: J3.GNDBREAK 149.56,39.21 148.93,38.58 148.93,24.29 149.88,23.34 149.88,18.1 J5.GNDBREAK
JOYB1  (via drill 0.38)
  Top 0.254: v44.15,40.64 44.15,41.12 43.83,41.43 43.83,43.66 44.31,44.13 44.31,45.24 44.63,45.24 45.1,45.72 50.34,45.72 v50.66,45.4
  Bottom 0.254: v44.15,40.64 44.15,39.21 45.42,37.94 45.42,30.32 41.77,26.67 TEENSY.47 | v50.66,45.4 52.72,47.47 52.72,47.94 53.36,48.58 102.73,48.58 102.73,46.2 J10.5
JOYB2  (via drill 0.38)
  Top 0.254: v28.75,22.7 45.42,22.7 46.69,23.97 TEENSY.44
  Bottom 0.254: v28.75,22.7 21.77,29.69 21.77,43.97 23.83,46.04 J11.5
JOYH1  (via drill 0.38)
  Top 0.381: v88.28,25.72 88.44,25.56 98.44,25.56 v98.6,25.72 | v98.6,30.16 101.46,33.02 v101.46,33.18 | v105.59,43.5 v103.21,41.12
  Bottom 0.381: v88.28,25.72 84.95,29.05 TEENSY.A11 | v98.6,30.16 v98.6,25.72 | v101.46,33.18 103.21,34.92 v103.21,41.12 | v105.59,43.5 107.81,45.72 107.81,46.04 J10.3
JOYH2  (via drill 0.38)
  Top 0.381: v28.75,18.73 28.91,18.89 36.21,18.89 36.37,19.05 39.07,19.05 41.61,16.51 TEENSY.31
  Bottom 0.381: v28.75,18.73 21.13,26.35 21.13,45.4 23.36,47.62 28.91,47.62 28.91,46.2 J11.3
JOYV1  (via drill 0.38)
  Top 0.381: v89.87,26.67 100.83,26.67 100.98,26.51 102.41,26.51 v104.16,28.26
  Bottom 0.381: v89.87,26.67 87.49,29.05 TEENSY.A10 | v104.16,28.26 105.75,29.84 105.75,36.2 104,37.94 104,40.64 104.64,41.27 104.64,45.09 105.27,45.72 J10.4
JOYV2  (via drill 0.38)
  Top 0.381: v30.66,17.94 30.82,18.1 36.37,18.1 36.53,18.26 37.33,18.26 39.07,16.51 TEENSY.32
  Bottom 0.381: v30.66,17.94 30.98,18.26 30.98,22.7 31.45,23.18 31.45,27.46 25.1,33.81 25.1,44.45 26.37,45.72 J11.4
LED1  (via drill 0.38)
  Top 0.254: v43.99,12.06 12.88,12.06 9.7,8.89 9.7,6.83 12.4,6.83 13.51,5.71 STRIP1.7
  Bottom 0.254: v43.99,12.06 47.96,16.03 47.96,16.51 48.44,16.99 48.44,23.18 49.23,23.97 TEENSY.43
LED2  (via drill 0.38)
  Top 0.254: v41.45,13.97 v55.9,13.97 | v38.75,14.76 37.17,16.35 v34.94,16.35 | v32.56,21.11 32.4,21.27 17.16,21.27 16.53,21.91 14.94,21.91 13.67,20.64 STRIP2.7
  Bottom 0.254: v55.9,13.97 55.9,16.83 56.69,17.62 56.69,23.81 56.85,23.97 TEENSY.41 | v41.45,13.97 41.14,13.97 40.5,13.34 38.75,13.34 v38.75,14.76 | v34.94,16.35 32.56,18.73 v32.56,21.11
LED3
  Bottom 0.254: TEENSY.53 59.55,26.51 60.66,25.4 60.66,9.68 61.46,8.89 61.46,7.94 60.34,6.83 57.65,6.83 57.65,5.71 STRIP3.7
LED4  (via drill 0.38)
  Top 0.254: v96.86,14.92 96.54,14.92 95.11,16.35 TEENSY.0 | v105.11,2.06 106.54,0.64 132.73,0.64 136.54,4.45 STRIP4.7
  Bottom 0.254: v96.86,14.92 99.4,12.38 99.4,7.78 v105.11,2.06
LED5  (via drill 0.38)
  Top 0.254: v93.36,23.97 84.32,23.97 83.2,25.08 82.25,25.08 81.78,25.56 81.3,25.56 81.3,26.51 80.19,27.62 78.28,27.62 77.33,26.67 TEENSY.55 | v96.7,28.42 96.86,28.57 v101.46,28.57 | v104.64,23.97 105.59,23.02 126.54,23.02 127.18,23.65 135.12,23.65 136.39,24.92 STRIP5.7
  Bottom 0.254: v93.36,23.97 96.7,27.3 v96.7,28.42 | v101.46,28.57 104.64,25.4 v104.64,23.97
LED6  (via drill 0.38)
  Top 0.254: v109.87,32.7 101.94,24.77 84.16,24.77 82.41,26.51 TEENSY.57 | v109.87,37.15 110.03,37.31 115.91,37.31 116.86,38.26 137.5,38.26 140.35,41.12 140.35,42.86 137.81,42.86 136.7,41.75 STRIP6.7
  Bottom 0.254: v109.87,37.15 v109.87,32.7
M_INA  (via drill 0.38)
  Top 0.254: v40.34,14.13 39.71,13.49 15.74,13.49 14.62,14.61 8.91,14.61 3.83,19.68 3.83,38.26 5.89,38.26 J4.2
  Bottom 0.254: v40.34,14.13 40.34,20.16 44.15,23.97 TEENSY.45
M_INB  (via drill 0.38)
  Top 0.254: v39.55,21.91 22.72,21.91 22.56,21.75 22.24,21.75 15.89,28.1 14.15,28.1 7.16,35.08 7.16,38.26 8.43,38.26 J4.4
  Bottom 0.254: v39.55,21.91 41.61,23.97 TEENSY.46
M_PWMA  (via drill 0.38)
  Top 0.254: v38.6,45.56 36.06,43.02 v7.16,43.02
  Bottom 0.254: v38.6,45.56 38.6,46.83 44.95,46.83 47.17,44.61 47.17,32.07 46.85,31.75 TEENSY.36 | v7.16,43.02 7.16,36.83 6.05,35.72 J4.1
M_PWMB
  Top 0.254: TEENSY.35 44.15,31.59 43.2,30.64 42.25,30.64 42.09,30.48 41.29,30.48 41.14,30.64 39.71,30.64 39.23,30.16 36.37,30.16 34.79,28.57 15.58,28.57 8.59,35.56 J4.3
N$2  (via drill 0.38)
  Top 0.254: v104.64,20.95 104.32,21.27 93.36,21.27 92.73,20.64 92.41,20.64 91.78,21.27 71.93,21.27 71.14,20.48 69.71,20.48 LED1.A
  Bottom 0.254: v104.64,20.95 104.64,20.8 107.33,20.8 R1.2
N$3  (via drill 0.38)
  Top 0.254: v122.1,12.54 120.51,10.95 116.07,10.95 115.91,11.11 100.67,11.11 100.51,10.95 v97.97,10.95
  Bottom 0.254: v122.1,12.54 124.32,14.76 U1.5 | v97.97,10.95 96.06,9.05 96.06,1.91 95.11,0.95 66.85,0.95 66.85,6.67 67.81,7.62 69.55,7.62 SW2.2
N$4
  Bottom 0.254: RELAY1.1 132.1,32.86 126.23,32.86 126.23,18.57 125.11,17.46 124.48,17.46 U1.7
N$5
  Bottom 0.254: 140.04,15.72 140.04,16.19 R3.1 140.04,15.72 | 140.04,15.72 140.04,13.02 R2.2 | 140.04,15.72 155.59,15.72 155.59,33.97 154.48,35.08 J12.1
N$6
  Top 0.254: RELAY1.8 149.88,33.02 145.91,36.99 145.91,43.97 146.7,43.97 J3.PWR
N$7
  Bottom 0.254: U$1.13 92.73,2.86 92.25,3.33 92.25,3.49 84.63,11.11 83.05,11.11 82.25,11.91 81.62,11.91 RN1.1
N$8
  Bottom 0.254: U$1.14 91.46,2.86 90.98,3.33 90.98,3.49 83.84,10.64 81.62,10.64 RN1.2
N$11
  Bottom 0.254: U$1.15 90.19,2.86 89.71,3.33 89.71,3.49 83.84,9.37 81.62,9.37 RN1.3
N$12
  Bottom 0.254: U$1.17 87.65,2.86 87.17,3.33 87.17,3.49 83.84,6.83 81.62,6.83 RN1.5
N$13
  Bottom 0.254: U$1.16 88.92,2.86 88.44,3.33 88.44,3.49 83.84,8.1 81.62,8.1 RN1.4
N$14
  Bottom 0.254: U$1.18 86.38,2.86 85.9,3.33 85.9,3.49 83.84,5.56 81.62,5.56 RN1.6
N$15
  Bottom 0.254: U$1.19 85.11,2.86 84.63,3.33 84.63,3.49 83.84,4.29 81.62,4.29 RN1.7
N$16
  Bottom 0.254: U$1.20 83.84,2.86 81.62,2.86 81.62,3.02 RN1.8
N$17  (via drill 0.38)
  Top 0.254: v68.76,37.94 70.35,36.35 v71.3,36.35
  Bottom 0.254: v68.76,37.94 61.61,45.09 61.61,45.4 61.14,45.88 U$2.13 | v71.3,36.35 72.89,36.35 72.89,36.83 RN2.1
N$18  (via drill 0.38)
  Top 0.254: v69.87,38.1 70.5,37.47 v71.3,37.47
  Bottom 0.254: v69.87,38.1 62.88,45.09 62.88,45.4 62.41,45.88 U$2.14 | v71.3,37.47 72.89,37.47 72.89,38.1 RN2.2
N$19
  Bottom 0.254: U$2.15 63.68,45.88 64.15,45.4 64.15,45.09 69.71,39.53 72.89,39.53 RN2.3
N$20
  Bottom 0.254: U$2.16 64.95,45.88 65.42,45.4 65.42,45.09 69.71,40.8 72.89,40.8 RN2.4
N$21
  Bottom 0.254: U$2.17 66.22,45.88 66.69,45.4 66.69,45.09 69.71,42.07 72.89,42.07 RN2.5
N$22
  Bottom 0.254: U$2.18 67.49,45.88 67.96,45.4 67.96,45.09 69.71,43.34 72.89,43.34 RN2.6
N$23
  Bottom 0.254: U$2.19 68.76,45.88 69.23,45.4 69.23,45.09 69.71,44.61 72.89,44.61 RN2.7
N$24
  Bottom 0.254: U$2.20 70.03,45.88 72.89,45.88 RN2.8
PI-REST
  Bottom 0.254: R2.1 138.13,12.86 140.35,10.64 140.35,6.83 139.4,5.87 132.73,5.87 132.73,8.57 127.5,13.81 127.5,15.56 127.02,16.03 124.48,16.03 U1.6
PWM1
  Bottom 0.254: U$1.8 92.73,12.38 92.25,12.86 92.25,14.13 90.03,16.35 TEENSY.2
PWM2
  Bottom 0.254: U$1.7 91.46,12.38 90.98,12.86 90.98,13.18 87.81,16.35 87.49,16.35 TEENSY.3
PWM3
  Bottom 0.254: U$1.6 90.19,12.38 89.71,12.86 89.71,13.18 87.65,15.24 84.95,15.24 84.95,16.35 TEENSY.4
PWM4  (via drill 0.38)
  Top 0.254: v88.44,10.95 83.05,16.35 82.41,16.35 TEENSY.5
  Bottom 0.254: v88.44,10.95 88.44,11.75 88.92,12.22 U$1.5
PWM5  (via drill 0.38)
  Top 0.254: v87.17,10.95 85.9,12.22 82.89,12.22 v80.66,14.45
  Bottom 0.254: v87.17,10.95 87.17,11.75 87.65,12.22 U$1.4 | v80.66,14.45 79.87,15.24 79.87,16.35 TEENSY.6
PWM6  (via drill 0.38)
  Top 0.254: v86.38,14.45 86.38,17.46 78.28,17.46 77.33,16.51 TEENSY.7
  Bottom 0.254: v86.38,14.45 86.38,12.38 U$1.3
PWM7  (via drill 0.38)
  Top 0.254: v84.63,13.81 83.2,15.24 75.9,15.24 74.79,16.35 TEENSY.8
  Bottom 0.254: v84.63,13.81 84.63,12.86 85.11,12.38 U$1.2
PWM8
  Bottom 0.254: U$1.1 83.84,12.38 83.84,13.81 83.05,14.61 83.05,15.56 83.52,16.03 83.52,21.27 80.98,23.81 80.98,24.29 79.87,25.4 78.44,25.4 78.44,26.83 77.65,27.62 75.9,27.62 75.9,20.16 72.25,16.51 TEENSY.9
PWM9
  Bottom 0.254: U$2.8 60.98,36.51 60.5,36.99 60.5,44.93 60.34,45.09 60.34,46.99 59.55,47.78 53.2,47.78 53.2,43.02 51.45,41.27 51.45,40.48 50.66,39.69 50.66,37.78 49.39,36.51 49.39,31.75 TEENSY.37
PWM10  (via drill 0.38)
  Top 0.254: v58.12,23.18 57.49,22.54 v47.64,22.54
  Bottom 0.254: v58.12,23.18 58.12,26.67 60.66,29.21 60.66,31.75 61.61,32.7 61.61,35.72 62.25,36.35 U$2.7 | v47.64,22.54 46.85,21.75 46.85,16.51 TEENSY.29
PWM11  (via drill 0.38)
  Top 0.254: v63.2,30.8 62.73,30.32 53.2,30.32 51.93,31.59 TEENSY.38
  Bottom 0.254: v63.2,30.8 63.2,36.04 63.52,36.35 U$2.6
PWM12
  Bottom 0.254: U$2.5 64.95,36.51 65.42,36.99 65.42,37.15 65.74,37.47 66.69,37.47 66.69,32.07 67.01,31.75 TEENSY.14
PWM13  (via drill 0.38)
  Top 0.254: v62.88,27.62 53.99,27.62 53.04,26.67 53.04,25.08 v46.06,25.08
  Bottom 0.254: v62.88,27.62 65.74,30.48 65.74,36.04 66.06,36.35 U$2.4 | v46.06,25.08 45.42,24.45 45.42,17.62 44.31,16.51 TEENSY.30
PWM14  (via drill 0.38)
  Top 0.254: v67.81,35.08 67.96,34.92 v69.39,34.92
  Bottom 0.254: v67.81,35.08 67.81,36.04 67.49,36.35 U$2.3 | v69.39,34.92 72.09,32.23 72.09,31.75 TEENSY.16
PWM15
  Bottom 0.254: U$2.2 68.6,36.35 68.6,32.23 68.44,32.07 68.44,17.62 69.55,16.51 TEENSY.10
PWM16
  Bottom 0.254: U$2.1 70.03,36.35 74.63,31.75 TEENSY.17
PWM_1  (via drill 0.38)
  Top 0.254: v71.77,3.02 70.19,1.43 43.83,1.43 42.09,3.17 32.09,3.17 29.86,5.4 17.64,5.4 16.53,4.29 12.4,4.29 11.13,5.56 STRIP1.5
  Bottom 0.254: v71.77,3.02 76.38,3.02 RN1.9
PWM_2  (via drill 0.38)
  Top 0.254: v79.39,8.73 74,14.13 56.69,14.13 55.9,14.92 39.87,14.92 38.91,13.97 25.74,13.97 v25.42,14.29
  Bottom 0.254: v79.39,8.73 79.39,3.49 78.44,3.49 77.81,4.13 77.81,4.29 76.54,4.29 RN1.10 | v25.42,14.29 17.32,6.19 17.32,5.08 16.53,4.29 12.24,4.29 12.24,7.14 11.13,8.26 STRIP1.6
PWM_3  (via drill 0.38)
  Top 0.254: v78.6,4.29 75.27,0.95 v34.47,0.95 | v28.12,7.46 25.1,10.48 v15.26,10.48
  Bottom 0.254: v78.6,4.29 78.6,5.56 76.54,5.56 RN1.11 | v34.47,0.95 28.12,7.3 v28.12,7.46 | v15.26,10.48 14.47,11.27 14.47,17.14 11.13,20.48 STRIP2.5
PWM_4  (via drill 0.38)
  Top 0.254: v78.12,8.73 76.06,10.79 59.71,10.79 58.6,11.91 45.1,11.91 43.99,13.02 v15.26,13.02
  Bottom 0.254: v78.12,8.73 78.12,6.99 76.54,6.99 RN1.12 | v15.26,13.02 14.94,13.34 14.94,17.46 12.24,20.16 12.24,22.23 11.13,23.34 STRIP2.6
PWM_5  (via drill 0.38)
  Top 0.254: v74.63,4.92 74.31,4.6 60.98,4.6 60.66,4.29 56.38,4.29 55.11,5.56 STRIP3.5
  Bottom 0.254: v74.63,4.92 74.63,8.1 76.38,8.1 RN1.13
PWM_6  (via drill 0.38)
  Top 0.254: v74.63,10 74.31,10.32 59.55,10.32 59.39,10.48 v57.17,10.48
  Bottom 0.254: v74.63,10 74.63,9.53 76.38,9.53 RN1.14 | v57.17,10.48 55.11,8.41 STRIP3.6
PWM_7  (via drill 0.38)
  Top 0.254: v78.76,19.21 79.87,20.32 91.46,20.32 92.09,19.68 97.17,19.68 v97.49,19.37 | v98.6,20.48 98.92,20.16 v118.29,20.16
  Bottom 0.254: v78.76,19.21 78.76,10.79 76.54,10.79 RN1.15 | v98.6,20.48 v97.49,19.37 | v118.29,20.16 123.05,15.4 127.02,15.4 127.02,4.45 129.24,2.22 134,2.22 134,4.45 STRIP4.5
PWM_8  (via drill 0.38)
  Top 0.254: v77.97,13.49 81.3,10.16 100.67,10.16 101.14,10.64 115.75,10.64 116.22,10.16 131.31,10.16 134,7.46 STRIP4.6
  Bottom 0.254: v77.97,13.49 76.54,12.06 RN1.16
PWM_9  (via drill 0.38)
  Top 0.254: v80.35,45.72 101.46,45.72 102.73,44.45 v113.68,44.45
  Bottom 0.254: v80.35,45.72 78.28,45.72 RN2.9 | v113.68,44.45 117.49,48.26 140.83,48.26 140.83,25.08 139.4,23.65 134,23.65 134,24.92 STRIP5.5
PWM_10  (via drill 0.38)
  Top 0.254: v82.25,46.67 101.62,46.67 102.57,47.62 109.87,47.62 110.03,47.47 v117.65,47.47
  Bottom 0.254: v82.25,46.67 80.19,44.61 78.28,44.61 RN2.10 | v117.65,47.47 126.23,47.47 126.23,39.05 131.62,33.66 133.85,33.66 133.85,27.94 STRIP5.6
PWM_11  (via drill 0.38)
  Top 0.254: v75.74,38.73 81.62,32.86 82.89,32.86 83.68,32.07 83.68,30.32 v95.9,30.32 | v99.71,39.37 100.19,39.85 117.81,39.85 118.29,39.37 v132.26,39.37
  Bottom 0.254: v75.74,38.73 75.74,43.18 78.12,43.18 RN2.11 | v95.9,30.32 96.38,30.8 96.38,36.04 v99.71,39.37 | v132.26,39.37 134,41.12 134,41.59 STRIP6.5
PWM_12  (via drill 0.38)
  Top 0.254: v76.54,41.91 80.03,38.42 80.03,35.08 100.83,35.08 101.78,36.04 108.6,36.04 109.08,35.56 117.81,35.56 119.72,37.47 v132.58,37.47
  Bottom 0.254: v76.54,41.91 78.12,41.91 RN2.12 | v132.58,37.47 135.27,40.16 135.27,43.18 134.16,44.29 STRIP6.6
PWM_13  (via drill 0.38)
  Top 0.254: v76.54,40.8 71.46,45.88 55.58,45.88 55.26,46.2 44.63,46.2 43.04,44.61 S1.A
  Bottom 0.254: v76.54,40.8 78.12,40.8 RN2.13
PWM_14  (via drill 0.38)
  Top 0.254: v76.54,39.53 70.66,45.4 55.42,45.4 55.11,45.72 53.2,45.72 52.09,44.61 S2.A
  Bottom 0.254: v76.54,39.53 78.12,39.53 RN2.14
PWM_15
  Bottom 0.254: RN2.15 78.28,38.26 80.35,38.26 80.35,44.13 81.93,45.72 84.95,45.72 84.95,44.61 S3.A
PWM_16  (via drill 0.38)
  Top 0.254: v80.82,36.99 81.62,37.78 v94,37.78
  Bottom 0.254: v80.82,36.99 78.28,36.99 RN2.16 | v94,37.78 95.27,39.05 95.27,40.96 94.16,42.07 94.16,44.45 S4.A
S1
  Top 0.254: TEENSY.33 39.07,31.75 38.6,32.23 35.9,32.23 34.79,33.34 31.29,33.34 31.13,33.18 25.42,33.18 24.47,34.13 12.56,34.13 11.13,35.56 J4.5
  Bottom 0.254: J1.3 5.1,46.04 9.7,41.43 9.7,36.99 10.97,35.72 J4.5
S2  (via drill 0.38)
  Top 0.254: v41.29,36.99 38.44,39.85 12.56,39.85 11.13,38.42 J4.6
  Bottom 0.254: v41.29,36.99 41.29,32.07 41.61,31.75 TEENSY.34 | J2.3 13.83,46.04 11.13,43.34 11.13,38.42 J4.6

## Text on the board
bPlace: 2017 Ali Momeni / Made in PGH | MOL v2-2.2